# Altium PCB ECE593_Double_Pulse_Project_PCB.PcbDoc
Units mil, origin at the board's own origin, x right, y up, seen from the top; angles counter-clockwise.
Board outline 6000 x 4000 mil, 2 copper layers (Top Layer, Bottom Layer); 70 components, 30 nets, 174 pads, 0 vias.
Unrouted connection lines stored in the file: 128.
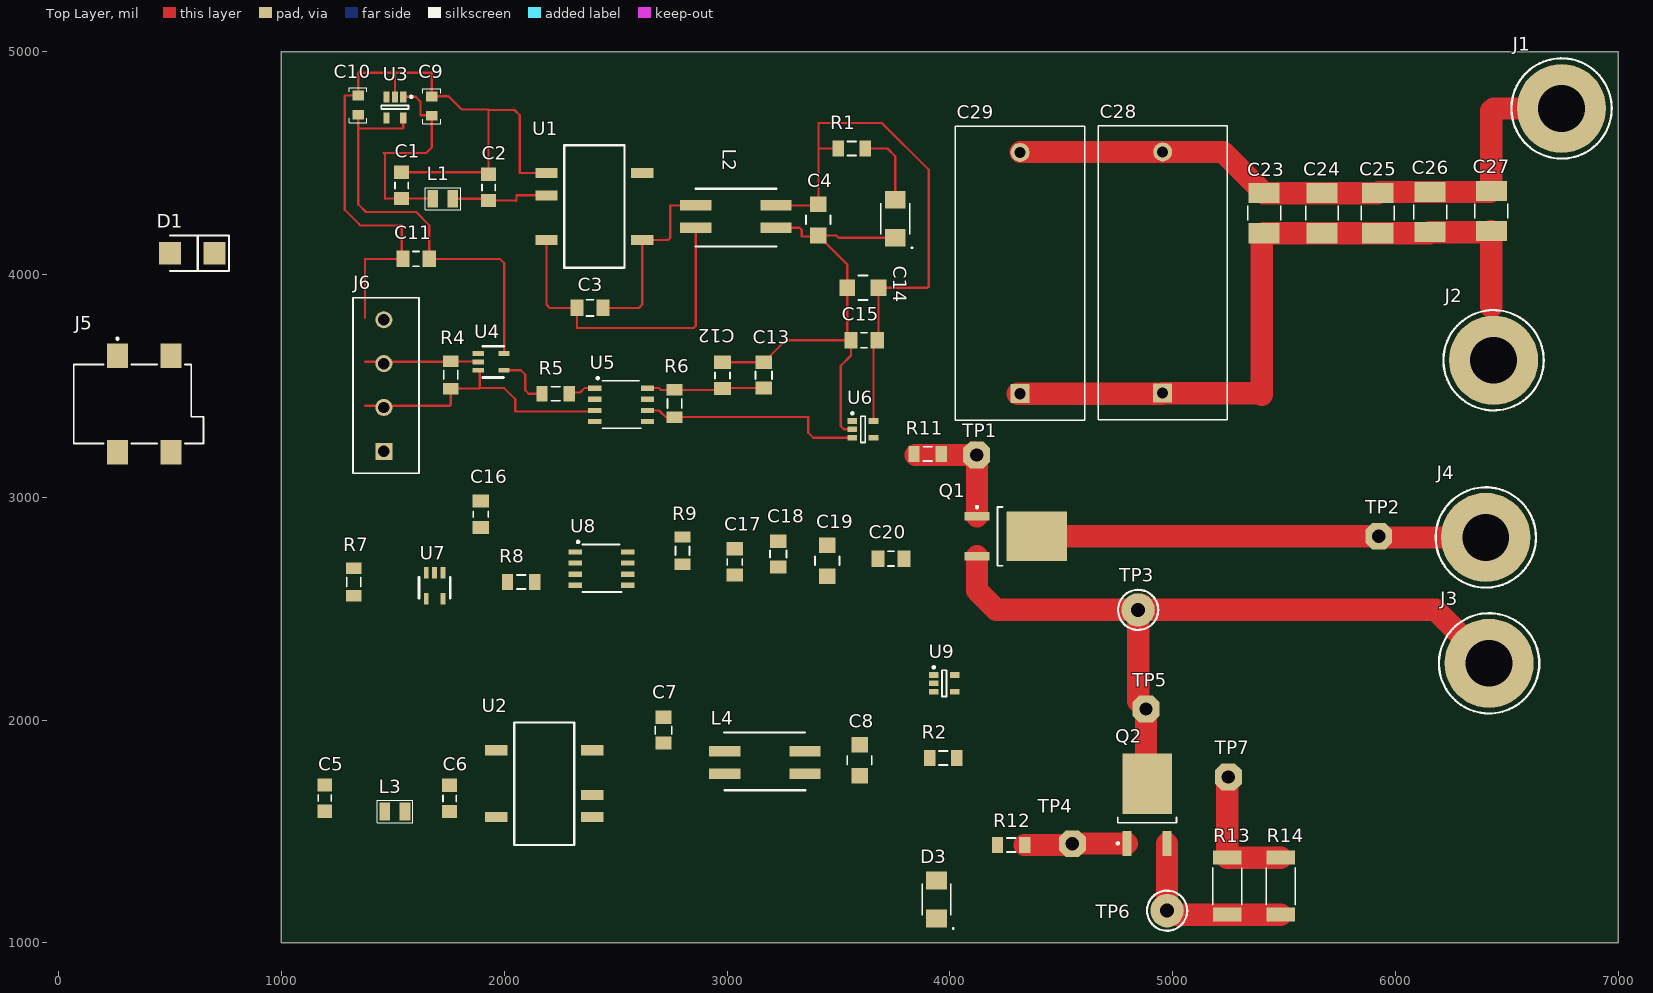
[diagram p0: Top Layer view]
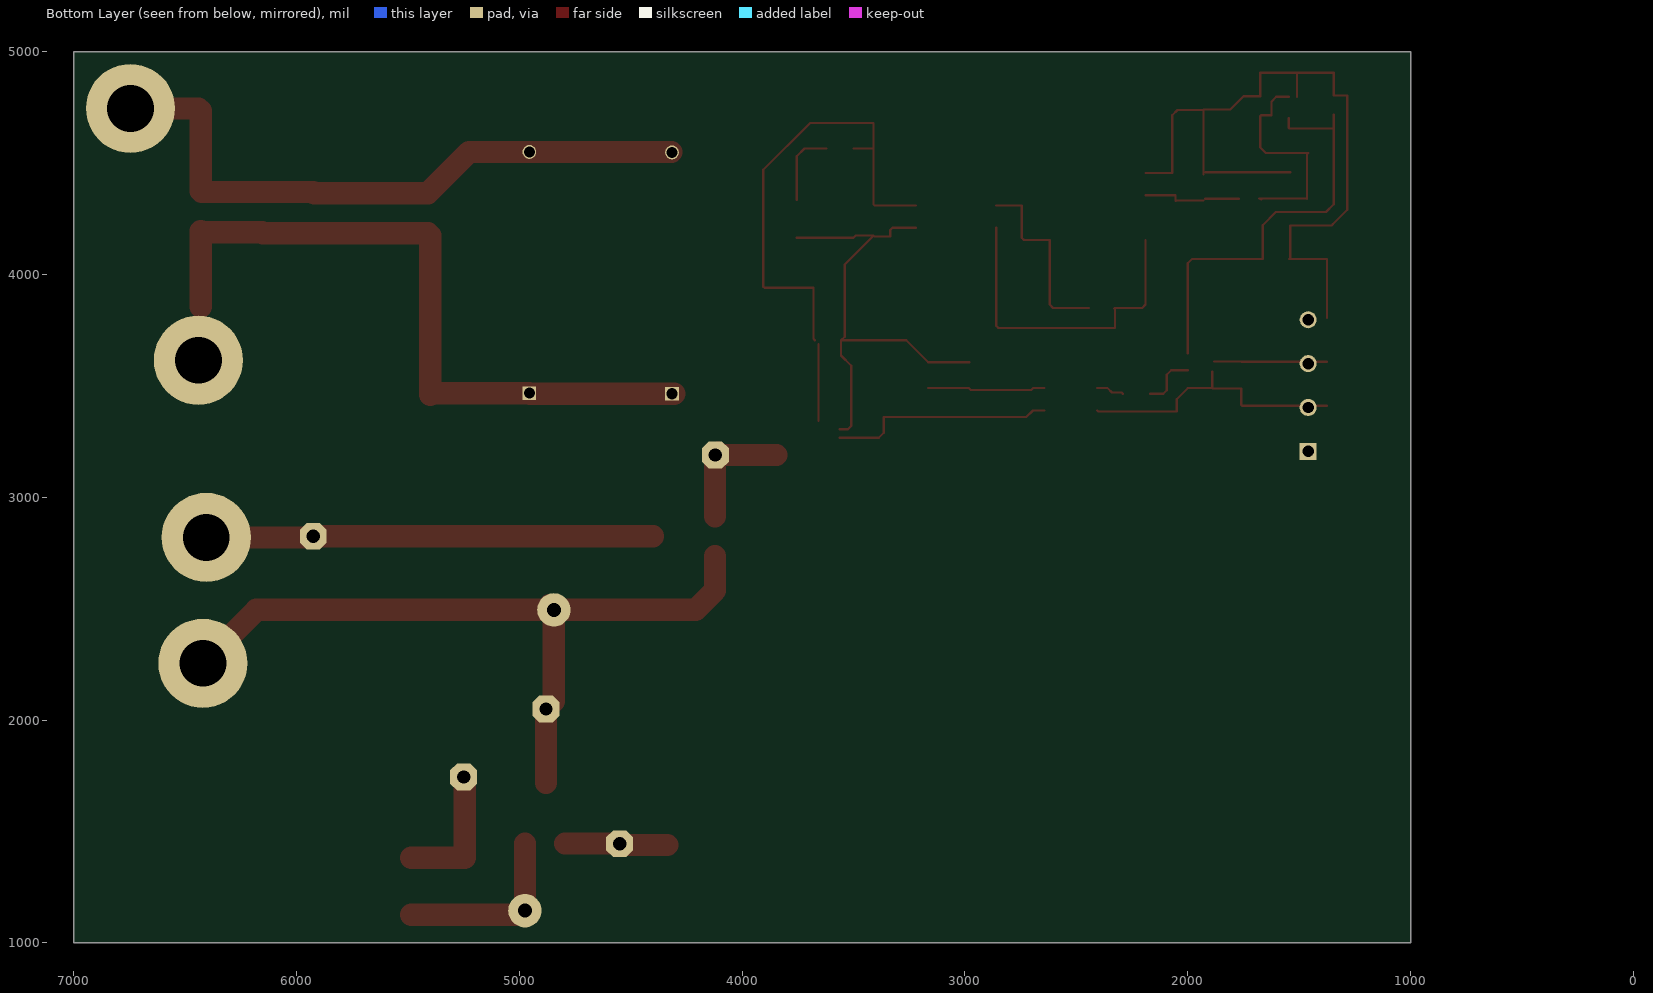
[diagram p1: Bottom Layer view, seen from below]

## Layer stack, top to bottom
Top Solder: solder mask 0.4, Solder Resist, Dk 3.5
Top Layer: signal copper 1.4
Dielectric 1: dielectric 12.6, FR-4, Dk 4.8
Bottom Layer: signal copper 1.4
Bottom Solder: solder mask 0.4, Solder Resist, Dk 3.5

## Board outline
1000,1000 7000,1000 7000,5000 1000,5000

## Design rules (kind name [scope] priority, off if disabled: settings)
Clearance [All] p1: gap=10 ignorepadtopadclearanceinfootprint=FALSE except(0: Arc-Hole Track-Hole SMDPad-Hole THPad-Hole Via-Hole Fill-Hole Poly-Hole Region-Hole Text-Hole)
PolygonConnect [All] p1: connectstyle=Relief reliefconductorwidth=10 reliefentries=4 polygonreliefangle="90 Angle" airgapwidth=10
RoutingVias [All] p1: holewidth=28 width=50 viastyle="Through Hole" minholewidth=28 minwidth=50 maxholewidth=28 maxwidth=50
SolderMaskExpansion [All] p1: expansion=4 istentingtop=FALSE
Width [All] p1: maxlimit=100 minlimit=10 preferedwidth=10
30 further rules are at their usual default settings.

## Classes and differential pairs
net class test1: +3.6 +5 GND
component class Main_Page: C23 C24 C25 C26 C27 C28 C29 J1 J2 J3 J4 Q1 R12 R13 R14 TP1 TP2 TP4 TP5 TP6 TP7
component class GateDrive: C11 C12 C13 C14 C16 C17 C18 C19 C20 R4 R5 R6 R7 R8 R9 U4 U6 U7 U8 U9
component class BoardPower: C1 C2 C3 C4 C5 C6 C7 C8 C9 C10 D1 D3 J5 J6 L1 L2 L3 L4 R1 R2 U1 U2 U3

## Components (designator, comment, footprint, x,y, rotation, side; value= is the part's Value field where it differs from the comment)
C1 "Taiyo Yuden UMK316ABJ475KD-T" PCB-sgxvsk2a58hocmmem9zc-1 1540,4400 r90 top
C2 "Taiyo Yuden UMK316ABJ475KD-T" PCB-sgxvsk2a58hocmmem9zc-1 1930,4390.94 r90 top
C3 "CL31A225KB9LNNC" FP-CL31-IPC_A 2385,3850 r180 top
C4 "Samsung CL31A106KACLNNC" CAPC3216X180X50ML20T25 3410,4245 r90 top
C5 "Taiyo Yuden UMK316ABJ475KD-T" PCB-sgxvsk2a58hocmmem9zc-1 1195,1650 r90 top
C6 "Taiyo Yuden UMK316ABJ475KD-T" PCB-sgxvsk2a58hocmmem9zc-1 1755,1649.06 r90 top
C7 "CL31A225KB9LNNC" FP-CL31-IPC_A 2715,1955 r270 top
C8 "Samsung CL31A106KACLNNC" CAPC3216X180X50ML20T25 3595,1820 r270 top
C9 "Würth Elektronik 885012207078" PCB-l1mgbkcjk127aryzwzh1-1 1675,4755 r270 top
C10 "Würth Elektronik 885012207078" PCB-l1mgbkcjk127aryzwzh1-1 1345,4760 r270 top
C11 "C1206C104K5RACTU" KEMT-1206-2_M 1605,4070 r180 top
C12 "C1206C104K5RACTU" KEMT-1206-2_M 2980,3546.89 r270 top
C13 "CL31A225KB9LNNC" FP-CL31-IPC_A 3165,3548.12 r90 top
C14 "Samsung CL31A106KACLNNC" CAPC3216X180X50ML20T25 3610,3940 r0 top
C15 "C1206C104K5RACTU" KEMT-1206-2_M 3615,3705 r0 top
C16 "C1206C104K5RACTU" KEMT-1206-2_M 1895,2924.06 r90 top
C17 "C1206C104K5RACTU" KEMT-1206-2_M 3035,2710 r90 top
C18 "CL31A225KB9LNNC" FP-CL31-IPC_A 3230,2745 r270 top
C19 "Samsung CL31A106KACLNNC" CAPC3216X180X50ML20T25 3450,2715 r90 top
C20 "C1206C104K5RACTU" KEMT-1206-2_M 3735.94,2725 r0 top
C23 "220 nF" CAPC480350_185N_KEM-M 5410,4275 r90 top
C24 "220 nF" CAPC480350_185N_KEM-M 5670,4275 r90 top
C25 "220 nF" CAPC480350_185N_KEM-M 5920,4275 r90 top
C26 "220 nF" CAPC480350_185N_KEM-M 6155,4280 r90 top
C27 "220 nF" CAPC480350_185N_KEM-M 6430,4285 r90 top
C28 "10 uF" DCP4_13.0WX24.0HX31.5L_2PIN_WIM 4955,3467.32 r90 top
C29 "10 uF" DCP4_13.0WX24.0HX31.5L_2PIN_WIM 4315,3465 r90 top
D1 "Comchip CDBA240L-HF" PCB-vqvgyl4w7md68ovtiswz-1 600,4095 r180 top
D2 "QTLP651C4TR" SMD-2_3P2X1P7_ONS-M 3755,4250 r90 top
D3 "QTLP651C4TR" SMD-2_3P2X1P7_ONS-M 3940,1195 r90 top
J1 "Keystone 575-4" PCB-csc5n6emwyzdyne8ltju-1 6745,4745 r0 top
J2 "Keystone 575-4" PCB-csc5n6emwyzdyne8ltju-1 6440,3615 r0 top
J3 "Keystone 575-4" PCB-csc5n6emwyzdyne8ltju-1 6420,2255 r0 top
J4 "Keystone 575-4" PCB-csc5n6emwyzdyne8ltju-1 6405,2820 r0 top
J5 "PJ-002AH-SMT-TR" CUI-PJ-002AH-4_V 359.33,3418.46 r0 top
J6 "691137710004" 691137710004 1469.84,3501.58 r90 top
L1 "TDK VLS252008ET-6R8M" PCB-fkaygjadjjsdxx713cih-1 1680,4340 r0 top value="6.8  µH"
L2 "Bourns SRF0905-100Y" PCB-3xxuz9rz4wogwyauw14r-1 3040,4260 r0 top
L3 "TDK VLS252008ET-6R8M" PCB-fkaygjadjjsdxx713cih-1 1465,1590 r0 top value="6.8  µH"
L4 "Bourns SRF0905-100Y" PCB-3xxuz9rz4wogwyauw14r-1 3170,1810 r180 top
Q1 "IPD60R380C6" INF-PG-TO252-3-313_M 4295,2825 r0 top
Q2 "IPD60R380C6" INF-PG-TO252-3-313_M 4885,1620 r90 top
R1 "RMCF1206FT1K00" RESC3216X60X45ML10T20 3560,4565 r180 top
R2 "RMCF1206FT1K00" RESC3216X60X45ML10T20 3970,1830 r180 top
R4 "RMCF1206FT10K0" RESC3216X60X45ML10T20 1760,3548.98 r270 top
R5 "CRCW1206511RFKEA" RESC3216X60X45ML10T20 2231.02,3465 r0 top
R6 "RMCF1206FT10K0" RESC3216X60X45ML10T20 2765,3421.02 r270 top
R7 "RMCF1206FT10K0" RESC3216X60X45ML10T20 1325,2620 r90 top
R8 "CRCW1206511RFKEA" RESC3216X60X45ML10T20 2076.02,2620 r0 top
R9 "RMCF1206FT10K0" RESC3216X60X45ML10T20 2800,2761.02 r270 top
R11 "CRCW120612R0JNEA" RESC3216X60X45ML10T20 3900,3195 r0 top
R12 "CRCW120612R0JNEA" RESC3216X60X45ML10T20 4275,1440 r0 top
R13 "CSRN2512FKR200" FP-CSRN2512-MFG 5245,1255 r90 top
R14 "CSRN2512FKR200" FP-CSRN2512-MFG 5485,1255 r90 top
TP1 "Keystone Electronics 5000" PCB-gm3691gcwmiln8nb0eoq-1 4120,3190 r0 top
TP2 "Keystone Electronics 5000" PCB-gm3691gcwmiln8nb0eoq-1 5925,2825 r0 top
TP3 "Keystone 5011" PCB-qzb0vyxebd51imkzt9uv-1 4845,2495 r0 top
TP4 "Keystone Electronics 5000" PCB-gm3691gcwmiln8nb0eoq-1 4550,1445 r0 top
TP5 "Keystone Electronics 5000" PCB-gm3691gcwmiln8nb0eoq-1 4880,2050 r0 top
TP6 "Keystone 5011" PCB-qzb0vyxebd51imkzt9uv-1 4975,1145 r0 top
TP7 "Keystone Electronics 5000" PCB-gm3691gcwmiln8nb0eoq-1 5250,1745 r0 top
U1 "CUI PDS1-S5-S12-M-TR" PCB-db6tqtrzp4l61tosig05-1 2405,4305 r270 top
U2 "CUI PDS1-S5-S12-M-TR" PCB-db6tqtrzp4l61tosig05-1 2180,1715 r90 top
U3 "STMicroelectronics LDK220M36R" SOT23-5L 1510,4750 r270 top
U4 "Diodes Incorporated ‎74LVC1G14W5-7‎" PCB-kpbwuq3jjzqbef0a2xnc-1 1888.7,3607.6 r270 top
U5 "ISO7710D" D0008B_HV 2525,3415 r0 top
U6 "UCC27518DBVR" PCB-2253518-1 3610,3305 r0 top
U7 "Diodes Incorporated ‎74LVC1G14W5-7‎" PCB-kpbwuq3jjzqbef0a2xnc-1 1687.6,2656.3 r180 top
U8 "ISO7710D" D0008B_HV 2436.73,2680 r0 top
U9 "UCC27518DBVR" PCB-2253518-1 3975,2165 r0 top

## Footprints (in the part's own frame and the unit in brackets; to place one, negate y for a bottom-side part, rotate by r counter-clockwise, add the part's x,y. Pads: shape width x height; smd on the part's side, far side on the other; paste and mask are expansions set on the pad)
691137710004 [mm] "Horizontal Cable Entry with Pressure Clamp, pitch 5mm, 04p"
  rect 1.95x1.95 hole 1.3: 1(-7.5,0.25)
  round 1.95 hole 1.3: 2(-2.5,0.25) 3(2.5,0.25) 4(7.5,0.25)
  silkscreen extent -10,-3.75 10,3.75, body extent -10,-3.75 10,3.75, height 11.6
CAPC3216X180X50ML20T25 [mil]
  rect 70x74.8 smd: 1(-70,0) 2(70,0)
  silkscreen extent -20,-55 20,55, body extent -67,-35 67,35, height 71
CAPC480350_185N_KEM-M [mil]
  rect 90x139.79 smd paste+0 mask+0: 1(-90,0) 2(90,0)
  silkscreen extent -33,-74 33,74, body extent -94,-69 94,69, height 73
CUI-PJ-002AH-4_V [mm] "SMD, 4-Leads, Body 14.8x9 mm, Pitch 6.1mm"
  rect 2.4x2.8 smd: 1(-2.4,5.5) 1(3.7,5.5) 2(-2.4,-5.5) 3(3.7,-5.5)
  round 0 hole 1.6: MH1(-2.4,0)
  round 0 hole 1.8: MH2(2.1,0)
  silkscreen extent -7.4,-4.5 7.4,7.57, body extent -7.4,-6.3 7.4,6.3, height 11.2
D0008B_HV [mil]
  rect 60x23.62 smd paste+0 mask+2: 1(-118,75) 2(-118,25) 3(-118,-25) 4(-118,-75) 5(118.27,-75) 6(118.27,-25) 7(118.27,25) 8(118.27,75)
  silkscreen extent -110,-105 90,125, body extent -119,-96 119,96, height 64
DCP4_13.0WX24.0HX31.5L_2PIN_WIM [mil]
  rect 85x85 / inner rect 62x62 / far side rect 62x62 hole 50 mask+0: 1(0,0)
  round 85 / inner round 62 / far side round 62 hole 50 mask+0: 2(1082.68,0)
  silkscreen extent -120,-290 1200,290, body extent -79,-256 1161,256, height 945
FP-CL31-IPC_A [mil]
  rect 59.27x73.16 smd paste+0 mask+0: 1(-58.12,0) 2(58.12,0)
  silkscreen extent -17,-37 17,37, body extent -107,-56 107,56, height 10
FP-CSRN2512-MFG [mm]
  rect 1.6x3.2 smd paste+0 mask+0: 1(-3.25,0) 2(3.25,0)
  silkscreen extent -2.07,-1.65 2.07,1.65, body extent -4.15,-1.75 4.15,1.75, height 0.25
INF-PG-TO252-3-313_M [mm]
  rect 2.85x1 smd: 1(-4.4,2.28) 3(-4.4,-2.28)
  rect 6.9x5.65 smd: 2(2.4,0)
  silkscreen extent -4.52,-3.35 -1.45,3.45, body extent -2.05,-3.32 4.17,3.32, height 2.35
KEMT-1206-2_M [mm] "SMD, 2-Leads, Body 3.4x1.8mm, IPC Low Density"
  rect 1.5x1.9 smd: 1(-1.5,0) 2(1.5,0)
  silkscreen extent -0.35,-0.85 0.35,0.85, body extent -1.7,-0.9 1.7,0.9, height 0.88
PCB-3xxuz9rz4wogwyauw14r-1 [mil]
  rect 140x47.24 smd: 1(-180,-50) 2(-180,50) 3(180,50) 4(180,-50)
  silkscreen extent -181,-135 182,125, body extent -181,-118 181,118, height 193
PCB-2253518-1 [mm]
  rect 1.1x0.65 smd: 1(-1.2,0.95) 2(-1.2,0) 3(-1.2,-0.95) 4(1.2,-0.95) 5(1.2,0.95)
  silkscreen extent -1.32,-1.5 0.25,1.95, body extent -0.83,-1.49 0.83,1.5, height 1.19
PCB-csc5n6emwyzdyne8ltju-1 [mil]
  round 400 hole 210: 1(0,0)
  silkscreen extent -225,-225 225,225, body extent -156,-156 156,156, height 200
PCB-db6tqtrzp4l61tosig05-1 [mil]
  rect 45x100 smd: 0(-150,215) 1(-150,-215) 2(-50,-215) 4(150,-215) 5(150,215)
  silkscreen extent -275,-135 275,135, body extent -250,-221 250,221, height 276
PCB-fkaygjadjjsdxx713cih-1 [mm]
  rect 1.2x2 smd: 1(0,0) 2(2.286,0)
  silkscreen extent -0.89,-1.27 3.17,1.27, body extent -0.15,-0.97 2.35,1.03, height 0.25
PCB-gm3691gcwmiln8nb0eoq-1 [mil]
  oct 120x120 hole 60: TP(0,0)
  body extent -50,-50 50,50, height 180
PCB-kpbwuq3jjzqbef0a2xnc-1 [mm]
  rect 0.55x1.27 smd: 1(-0.95,-0.127) 2(0,-0.127) 3(0.95,-0.127) 4(0.95,2.827) 5(-0.95,2.827)
  silkscreen extent -1.78,0.38 1.78,2.76, body extent -1.45,0 1.45,2.8, height 1.2
PCB-l1mgbkcjk127aryzwzh1-1 [mm]
  rect 1.1x1.35 smd: 1(-1.1,0) 2(1.1,0)
  silkscreen extent -2,-1 2,1, body extent -1.1,-0.72 1.1,0.72, height 1.4
PCB-qzb0vyxebd51imkzt9uv-1 [mil]
  round 150 hole 63: 1(0,0)
  silkscreen extent -90,-90 90,90, body extent -62,-62 63,63, height 320
PCB-sgxvsk2a58hocmmem9zc-1 [mm]
  rect 1.5x1.7 smd: 1(-1.5,0) 2(1.5,0)
  silkscreen extent -0.35,-0.75 0.35,0.75, body extent -1.7,-0.9 1.7,0.9, height 0.88
PCB-vqvgyl4w7md68ovtiswz-1 [mil]
  rect 100x100 smd: 1(100,0) 2(-100,0)
  silkscreen extent -165,-80 100,80, body extent -104,-57 104,57, height 100
RESC3216X60X45ML10T20 [mm] "Chip Resistor, 2-Leads, Body 3.20x1.60mm, IPC Low Density"
  rect 1.3x1.8 smd: 1(-1.55,0) 2(1.55,0)
  silkscreen extent -0.5,-0.8 0.5,0.8, body extent -1.65,-0.85 1.65,0.85, height 0.6
SMD-2_3P2X1P7_ONS-M [mil]
  rect 80x93 smd paste+0 mask+0: 1(-85,0) 2(85,0)
  silkscreen extent -133,-78 70,64, body extent -73,-59 73,59, height 83
SOT23-5L [mm]
  rect 1.25x0.7 smd: 1(-1.2,0.95) 2(-1.2,0) 3(-1.2,-0.95) 4(1.2,-0.95) 5(1.2,0.95)
  silkscreen extent -1.32,-1.55 0.2,1.98, body extent -0.87,-1.52 0.87,1.53, height 1.1

## Part data
C1 C2 C5 C6: library part CMP-7a94b2a8e5e7a553-1, "Cap Ceramic 4.7uF 50V X5R 10% SMD 1206 85°C Paper T/R", Capacitance="4.70 µF", Capacitance Tolerance=±10%, Dielectric Characteristic=X5R, Manufacturer Part Number=UMK316ABJ475KD-T, Voltage Rating (DC)="50.0 V", Lifecycle Status="Not Listed by Manufacturer", Number of Pins=2, Octopart URL=http://octopart.com/umk316abj475kd-t-taiyo+yuden-20363797, OctopartID=7a94b2a8e5e7a553, Packaging="Cut Tape (CT)", RoHS=Compliant, Supplier=Digikey, Supplier Part Number=UMK316ABJ475KD-T
C3 C7 C13 C18: library part CMP-13271-003141-1, "Cap Ceramic 2.2uF 50V X5R ±10% SMD 1206 +85°C Embossed T/R", Capacitance=2.2uF, Case Code (Imperial)=1206, Case Code (Metric)=3216, Dielectric=X5R, Max Operating Temperature=85°C, Min Operating Temperature=-55°C, Supplier Part Number=1276-2723-1-ND, Tolerance=10%, Voltage Rating=50V, Case/Package=1206, Depth=1.6mm, Height=0.9mm, Length=3.2mm, Mount="Surface Mount", Packaging="Tape and Reel", Radiation Hardening=No, Supplier=Digikey, Thickness=0.039inch, Width=0.063inch
C4 C8 C14 C19: library part CMP-20112613-2, "10 µF ±10% 25V Ceramic Capacitor X5R 1206 (3216 Metric)", Capacitance=10uF, Capacitance Tolerance=±10%, Case/Package=1206, Case/Package (SI)=3216, Dielectric Characteristic=X5R, Dielectric Material=Ceramic, Supplier Part Number=CL31A106KACLNNC, Voltage Rating (DC)="25.0 V", Lead-Free Status="Lead Free", Mounting Style="Surface Mount", Number of Pins=2, REACH SVHC Compliance="No SVHC", RoHS=Compliant, Supplier=Digikey
C9 C10: library part CMP-e4702e9cfb553bb7-2, "Capacitor, Mlcc, X7r, 1 uf, 25v, 0805", Capacitance="1 uF", Capacitance Tolerance=±10%, Dielectric Characteristic=X7R, Manufacturer Part Number=885012207078, Supplier Part Number=732-7672-1-ND, Voltage Rating (DC)="25.0 V", Digikey Number=732-7672-1-ND, Packaging="Cut Tape (CT)", RoHS=Compliant, Supplier=Digikey
C11 C12 C15 C16 C17 C20: library part CMP-1037-04202-2, "CAP, Ceramic, 0.1 uF, +/- 10%, 50 V, -55 to 125 degC, 1206 (3216 Metric), RoHS, Tape and Reel", Capacitance=0.1µF, Capacitance Tolerance=±10%, Capacitor Case Style=1206[3216Metric], Dielectric Characteristic=X7R, Manufacturer=Kemet, Operating Temperature Max=125degC, Operating Temperature Min=-55degC, Package Description="2-Leads SMD, Body 3.2 x 1.6 mm", Package Reference=1206-2, Supplier Part Number=399-C1206C104K5RAC7800CT-ND, Voltage Rating=50V, Datasheet URL=https://datasheet.ciiva.com/6125/1725438-6125494.pdf, Datasheet Version=Jul-13, Manufacturer URL=http://www.kemet.com/, Packaging=Tape&Reel, Product Range=KEMET-CSeries, Supplier=Digikey, SVHC=ToBeAdvised
C23: library part C1812C224KCRACAUTO, "CAP CER 1812 220NF 500V X7R 10%", Mfr_Name=Kemet, Copyright="Copyright (C) 2022 Ultra Librarian. All rights reserved.", Digi-Key_Part_Number_1=399-16784-2-ND, Digi-Key_Part_Number_2=399-16784-1-ND, Digi-Key_Part_Number_3=399-16784-6-ND, Manufacturer_Part_Number=C1812C224KCRACAUTO, RefDes=RefDes, Supplier=Digikey, Supplier Part Number=C1812C224KCRACAUTO, Type=DEV
C24 C25 C26 C27: library part C1812C224KCRACAUTO, "No Description Available", Mfr_Name=Kemet, Copyright="Copyright (C) 2022 Ultra Librarian. All rights reserved.", Digi-Key_Part_Number_1=399-16784-2-ND, Digi-Key_Part_Number_2=399-16784-1-ND, Digi-Key_Part_Number_3=399-16784-6-ND, Manufacturer_Part_Number=C1812C224KCRACAUTO, RefDes=RefDes, Supplier=Digikey, Supplier Part Number=C1812C224KCRACAUTO, Type=DEV
C28 C29: library part DCP4H151006DD2KSSD, "10 µF Film Capacitor - 500V Polypropylene (PP), Metallized Radial", Mfr_Name=Wima, Supplier Part Number=1928-DCP4H151006DD2KSSD-ND, Copyright="Copyright (C) 2022 Ultra Librarian. All rights reserved.", Digi-Key_Part_Number_1=1928-DCP4H151006DD2KSSD-ND, Manufacturer_Part_Number=DCP4H151006DD2KSSD, RefDes=RefDes, Supplier=Digikey, Type=DEV
D1: library part CMP-7a73b224736fa5b4-1, "DIODE SCHOTTKY 40V 2A DO214AC", Manufacturer Part Number=CDBA240L-HF, Octopart URL=http://octopart.com/cdba240l-hf-comchip-22883450, OctopartID=7a73b224736fa5b4, Supplier=Digikey, Supplier Part Number=CDBA240L-HF
D2 D3: "LED GREEN CLEAR 1206 SMD", Mfr_Name=onsemi, Supplier Part Number=QTLP651C4TR-ND, Copyright="Copyright (C) 2022 Ultra Librarian. All rights reserved.", Manufacturer_Part_Number=QTLP651C4TR, RefDes=RefDes, Supplier=Digikey, Type=DEV
J1 J2 J3 J4: library part CMP-d3511a5899970c96-2, "Banana Jack, Non-Insulated, 1-Pin THD, RoHS, Bulk", Manufacturer Part Number=575-4, Supplier Part Number=36-575-4-ND, Contact Material=Brass, Contact Plating=Nickel, Lead-Free Status="Lead Free", Number of Positions=1, Octopart URL=http://octopart.com/575-4-keystone-225184, OctopartID=d3511a5899970c96, RoHS=Compliant, Size-Diameter="0.0051562 m", Size-Length="0.007899 m", Supplier=Digikey
J5: library part CMP-2000-06896-1, "Power Barrel Connector Jack 2.00mm ID (0.079\"), 5.50mm OD (0.217\") Surface Mount", Current Rating=5A, Flammability Rating=UL94V-0, Insulation Resistance=100MOhms, Manufacturer=CUIInc., Operating Temperature Range=-25Cto+85C, Package Description="4-Pin Surface Mount Device, Body 14.8 x 9 mm, Pitch 6.1 mm", Package Reference=PJ-002AH, Voltage Rating=24V, Brand=CUI, Connector Type=DCPowerJack, Contact Gender=Male, Contact Material=Brass, Contact Plating=Nickel, Datasheet URL=http://www.cui.com/product/resource/pj-002ah-smt.pdf, Datasheet Version="Rev. 1.03, 11/2012", Factory Pack Quantity=350, Housing Material=Polyamide(PA), Inside Contact Diameter=2mm, Manufacturer URL=http://www.cui.com/, Mounting Angle=Right, Mounting Style=SMD/SMT, Mounting Technology=SurfaceMount, Outside Contact Diameter=6.5mm, Packaging=Reel, PartNumber=PJ-002AH, Product=Jacks, Product Category=DCPowerConnectors, RoHS=True, Supplier=Digikey, Supplier Part Number=PJ-002AH-SMT-TR, Termination Style=SMD/SMT
J6: library part CMP-1502-03326-1, "Series 1377 - 5.00 mm Horizontal Entry with Pressure Clamp WR-TBL, 4 pin", Operating Temperature=-30to120degC, Supplier Part Number=277-1579-ND, Mounting Technology=THT, Packaging=Box, Pin Number=4, Pitch=5.00mm, Supplier=Digikey
L1 L3: library part CMP-b12479fff73a6ee3-1, "Ind Power Shielded Wirewound 6.8uH 20% 1MHz Ferrite 500A 1008 Blister Plastic T/R", Manufacturer Part Number=VLS252008ET-6R8M, Supplier Part Number=445-15826-1-ND, Octopart URL=http://octopart.com/vls252008et-6r8m-tdk-30499704, OctopartID=b12479fff73a6ee3, RoHS=Compliant, Supplier=Digikey
L2 L4: library part CMP-726ebbfbaae1ada9-1, "Common Mode Chokes Dual 10uH 200Ohm 1kHz 1.6A 80mOhm DCR SMD T/R", Inductance="10.0  uH", Manufacturer Part Number=SRF0905-100Y, Supplier Part Number=SRF0905-100YCT-ND, Voltage Rating (DC)="50.0 V", Number of Pins=4, Octopart URL=http://octopart.com/srf0905-100y-bourns-10485225, OctopartID=726ebbfbaae1ada9, REACH SVHC Compliance="No SVHC", RoHS=Compliant, Supplier=Digikey
Q1 Q2: "N-Channel CoolMOS C6 Power-Transistor, 600 V VDS, 10.6 A ID, -55 to 150 degC, PG-TO252-3-313, Reel, Green", Power Dissipation="83.0 W", Supplier Part Number=IPD60R380C6INCT-ND, Lead-Free Status="Lead Free", Number of Pins=3, Octopart URL=https://octopart.com/ipd60r380c6-infineon-19074978, OctopartID=4865804c62a197a2, Polarity=N-Channel, REACH SVHC Compliance="No SVHC", RoHS=Compliant, Supplier=Digikey
R1 R2: library part CMP-2003-01783-1, "1 kOhms ±1% 0.25W, 1/4W Chip Resistor 1206 (3216 Metric) Automotive AEC-Q200 Thick Film", Case Code (Imperial)=1206, Case Code (Metric)=3216, Manufacturer=Vishay, Manufacturer Part Number=CRCW1206-10K0FKEA, Max Operating Temperature=155°C, Max Power Dissipation=250mW, Min Operating Temperature=-55°C, Package Quantity=10, Package Shape=Rectangular, Resistance=1k, Resistance Tolerance=1%, Resistor Type="Thick Film", Supplier Part Number=RMCF1206FT1K00CT-ND, Temperature Coefficient=100ppm/°C, Voltage Rating=200V, Case/Package=1206, ComponentLink1Description=https://datasheet.ciiva.com/6546/crcwhpe3-6546125.pdf?src-supplier=Digi-Key, ComponentLink1URL=https://datasheet.ciiva.com/6546/crcwhpe3-6546125.pdf?src-supplier=Digi-Key, ComponentLink2Description=https://datasheet.ciiva.com/48526/crcwhpe3-48526573.pdf?src-supplier=Avnet, ComponentLink2URL=https://datasheet.ciiva.com/48526/crcwhpe3-48526573.pdf?src-supplier=Avnet, ComponentLink3Description=https://datasheet.ciiva.com/6546/crcwhpe3-6546126.pdf?src-supplier=Digi-Key, ComponentLink3URL=https://datasheet.ciiva.com/6546/crcwhpe3-6546126.pdf?src-supplier=Digi-Key, ComponentLink4Description=https://datasheet.ciiva.com/6546/crcwhpe3-6546127.pdf?src-supplier=Digi-Key, ComponentLink4URL=https://datasheet.ciiva.com/6546/crcwhpe3-6546127.pdf?src-supplier=Digi-Key, ComponentLink5Description=https://datasheet.ciiva.com/12559/crcwhpe3-46056-12559151.pdf?src-supplier=Mouser, ComponentLink5URL=https://datasheet.ciiva.com/12559/crcwhpe3-46056-12559151.pdf?src-supplier=Mouser, ComponentLink6Description=https://datasheet.ciiva.com/48526/crcwhpe3-48526575.pdf?src-supplier=Avnet, ComponentLink6URL=https://datasheet.ciiva.com/48526/crcwhpe3-48526575.pdf?src-supplier=Avnet, ComponentLink7Description=https://datasheet.ciiva.com/11810/0900766b80d98b5e-11810137.pdf?src-supplier=RSComponents, ComponentLink7URL=https://datasheet.ciiva.com/11810/0900766b80d98b5e-11810137.pdf?src-supplier=RSComponents, ComponentLink8Description=https://datasheet.ciiva.com/19454/2173693-19454829.pdf?src-supplier=Jameco, ComponentLink8URL=https://datasheet.ciiva.com/19454/2173693-19454829.pdf?src-supplier=Jameco, ComponentLink9Description=https://datasheet.ciiva.com/2468/dcrcwe3-2468664.pdf?src-supplier=Digi-Key, ComponentLink9URL=https://datasheet.ciiva.com/2468/dcrcwe3-2468664.pdf?src-supplier=Digi-Key, ComponentLink10Description=https://datasheet.ciiva.com/5542/dcrcwe3-109170-5542312.pdf?src-supplier=Mouser, ComponentLink10URL=https://datasheet.ciiva.com/5542/dcrcwe3-109170-5542312.pdf?src-supplier=Mouser, ComponentLink11Description=https://datasheet.ciiva.com/2468/dcrcwe3-2468665.pdf?src-supplier=Digi-Key, ComponentLink11URL=https://datasheet.ciiva.com/2468/dcrcwe3-2468665.pdf?src-supplier=Digi-Key, ComponentLink12Description=https://datasheet.ciiva.com/2468/dcrcwe3-2468666.pdf?src-supplier=Digi-Key, ComponentLink12URL=https://datasheet.ciiva.com/2468/dcrcwe3-2468666.pdf?src-supplier=Digi-Key, ComponentLink13Description=https://datasheet.ciiva.com/9050/dcrcwe3-9050925.pdf?src-supplier=Avnet, ComponentLink13URL=https://datasheet.ciiva.com/9050/dcrcwe3-9050925.pdf?src-supplier=Avnet, ComponentLink14Description=https://datasheet.ciiva.com/16852/dcrcwe3-16852541.pdf?src-supplier=Avnet+Europe, ComponentLink14URL=https://datasheet.ciiva.com/16852/dcrcwe3-16852541.pdf?src-supplier=Avnet+Europe, ComponentLink15Description=https://datasheet.ciiva.com/46381/1720486-46381597.pdf?src-supplier=Element14, ComponentLink15URL=https://datasheet.ciiva.com/46381/1720486-46381597.pdf?src-supplier=Element14, ComponentLink16Description=https://datasheet.ciiva.com/16199/dcrcwe3-16199886.pdf?src-supplier=Future+Electronics, ComponentLink16URL=https://datasheet.ciiva.com/16199/dcrcwe3-16199886.pdf?src-supplier=Future+Electronics, ComponentLink17Description=https://datasheet.ciiva.com/26316/fld-crcw-e3-data-en-26316462.pdf?src-supplier=Distrelec, ComponentLink17URL=https://datasheet.ciiva.com/26316/fld-crcw-e3-data-en-26316462.pdf?src-supplier=Distrelec, ComponentLink18Description=https://datasheet.ciiva.com/16769/70201119-16769375.pdf?src-supplier=Allied+Electronics, ComponentLink18URL=https://datasheet.ciiva.com/16769/70201119-16769375.pdf?src-supplier=Allied+Electronics, Construction=Rectangular, Contact Plating=Tin, Depth=1.6mm, Features="Automotive AEC-Q200", Height=0.55mm, Lead Free="Lead Free", Length=3.2mm, Military Standard=Not, Number of Pins=2, Number of Terminations=2, Packaging="Tape and Reel", Power Rating=250mW, Radiation Hardening=No, REACH SVHC=Unknown, RoHS=Yes, RoHS Compliant=Yes, Size Code=1206, Stock 1=0, Supplier=Digikey, Technology="THICK FILM", Terminal Finish=Tin, Termination=SMD/SMT, Tolerance=1%, Voltage Rating (DC)=200V, Weight=0.000353oz, Width=0.063inch, Working Voltage=200V
R4 R6 R7 R9: library part CMP-2003-01783-1, "10 kOhms ±1% 0.25W, 1/4W Chip Resistor 1206 (3216 Metric) Automotive AEC-Q200 Thick Film", Case Code (Imperial)=1206, Case Code (Metric)=3216, Manufacturer=Vishay, Manufacturer Part Number=CRCW1206-10K0FKEA, Max Operating Temperature=155°C, Max Power Dissipation=250mW, Min Operating Temperature=-55°C, Package Quantity=10, Package Shape=Rectangular, Resistance=10k, Resistance Tolerance=1%, Resistor Type="Thick Film", Supplier Part Number=RMCF1206FT10K0CT-ND, Temperature Coefficient=100ppm/°C, Voltage Rating=200V, Case/Package=1206, ComponentLink1Description=https://datasheet.ciiva.com/6546/crcwhpe3-6546125.pdf?src-supplier=Digi-Key, ComponentLink1URL=https://datasheet.ciiva.com/6546/crcwhpe3-6546125.pdf?src-supplier=Digi-Key, ComponentLink2Description=https://datasheet.ciiva.com/48526/crcwhpe3-48526573.pdf?src-supplier=Avnet, ComponentLink2URL=https://datasheet.ciiva.com/48526/crcwhpe3-48526573.pdf?src-supplier=Avnet, ComponentLink3Description=https://datasheet.ciiva.com/6546/crcwhpe3-6546126.pdf?src-supplier=Digi-Key, ComponentLink3URL=https://datasheet.ciiva.com/6546/crcwhpe3-6546126.pdf?src-supplier=Digi-Key, ComponentLink4Description=https://datasheet.ciiva.com/6546/crcwhpe3-6546127.pdf?src-supplier=Digi-Key, ComponentLink4URL=https://datasheet.ciiva.com/6546/crcwhpe3-6546127.pdf?src-supplier=Digi-Key, ComponentLink5Description=https://datasheet.ciiva.com/12559/crcwhpe3-46056-12559151.pdf?src-supplier=Mouser, ComponentLink5URL=https://datasheet.ciiva.com/12559/crcwhpe3-46056-12559151.pdf?src-supplier=Mouser, ComponentLink6Description=https://datasheet.ciiva.com/48526/crcwhpe3-48526575.pdf?src-supplier=Avnet, ComponentLink6URL=https://datasheet.ciiva.com/48526/crcwhpe3-48526575.pdf?src-supplier=Avnet, ComponentLink7Description=https://datasheet.ciiva.com/11810/0900766b80d98b5e-11810137.pdf?src-supplier=RSComponents, ComponentLink7URL=https://datasheet.ciiva.com/11810/0900766b80d98b5e-11810137.pdf?src-supplier=RSComponents, ComponentLink8Description=https://datasheet.ciiva.com/19454/2173693-19454829.pdf?src-supplier=Jameco, ComponentLink8URL=https://datasheet.ciiva.com/19454/2173693-19454829.pdf?src-supplier=Jameco, ComponentLink9Description=https://datasheet.ciiva.com/2468/dcrcwe3-2468664.pdf?src-supplier=Digi-Key, ComponentLink9URL=https://datasheet.ciiva.com/2468/dcrcwe3-2468664.pdf?src-supplier=Digi-Key, ComponentLink10Description=https://datasheet.ciiva.com/5542/dcrcwe3-109170-5542312.pdf?src-supplier=Mouser, ComponentLink10URL=https://datasheet.ciiva.com/5542/dcrcwe3-109170-5542312.pdf?src-supplier=Mouser, ComponentLink11Description=https://datasheet.ciiva.com/2468/dcrcwe3-2468665.pdf?src-supplier=Digi-Key, ComponentLink11URL=https://datasheet.ciiva.com/2468/dcrcwe3-2468665.pdf?src-supplier=Digi-Key, ComponentLink12Description=https://datasheet.ciiva.com/2468/dcrcwe3-2468666.pdf?src-supplier=Digi-Key, ComponentLink12URL=https://datasheet.ciiva.com/2468/dcrcwe3-2468666.pdf?src-supplier=Digi-Key, ComponentLink13Description=https://datasheet.ciiva.com/9050/dcrcwe3-9050925.pdf?src-supplier=Avnet, ComponentLink13URL=https://datasheet.ciiva.com/9050/dcrcwe3-9050925.pdf?src-supplier=Avnet, ComponentLink14Description=https://datasheet.ciiva.com/16852/dcrcwe3-16852541.pdf?src-supplier=Avnet+Europe, ComponentLink14URL=https://datasheet.ciiva.com/16852/dcrcwe3-16852541.pdf?src-supplier=Avnet+Europe, ComponentLink15Description=https://datasheet.ciiva.com/46381/1720486-46381597.pdf?src-supplier=Element14, ComponentLink15URL=https://datasheet.ciiva.com/46381/1720486-46381597.pdf?src-supplier=Element14, ComponentLink16Description=https://datasheet.ciiva.com/16199/dcrcwe3-16199886.pdf?src-supplier=Future+Electronics, ComponentLink16URL=https://datasheet.ciiva.com/16199/dcrcwe3-16199886.pdf?src-supplier=Future+Electronics, ComponentLink17Description=https://datasheet.ciiva.com/26316/fld-crcw-e3-data-en-26316462.pdf?src-supplier=Distrelec, ComponentLink17URL=https://datasheet.ciiva.com/26316/fld-crcw-e3-data-en-26316462.pdf?src-supplier=Distrelec, ComponentLink18Description=https://datasheet.ciiva.com/16769/70201119-16769375.pdf?src-supplier=Allied+Electronics, ComponentLink18URL=https://datasheet.ciiva.com/16769/70201119-16769375.pdf?src-supplier=Allied+Electronics, Construction=Rectangular, Contact Plating=Tin, Depth=1.6mm, Features="Automotive AEC-Q200", Height=0.55mm, Lead Free="Lead Free", Length=3.2mm, Military Standard=Not, Number of Pins=2, Number of Terminations=2, Packaging="Tape and Reel", Power Rating=250mW, Radiation Hardening=No, REACH SVHC=Unknown, RoHS=Yes, RoHS Compliant=Yes, Size Code=1206, Supplier=Digikey, Technology="THICK FILM", Terminal Finish=Tin, Termination=SMD/SMT, Tolerance=1%, Voltage Rating (DC)=200V, Weight=0.000353oz, Width=0.063inch, Working Voltage=200V
R5 R8: library part CMP-2003-02260-1, "510 Ohms ±5% 0.25W, 1/4W Chip Resistor 1206 (3216 Metric) Moisture Resistant Thick Film", Case Code (Imperial)=1206, Case Code (Metric)=3216, Manufacturer="Vishay Dale", Manufacturer Part Number=CRCW1206511RFKEAHP, Max Operating Temperature=155°C, Max Power Dissipation=500mW, Min Operating Temperature=-55°C, Package Quantity=5000, Part Number=RC1206JR-07510RL, Resistance=510R, Resistor Type="Thick Film", Supplier Part Number=311-510ERCT-ND, Temperature Coefficient=100ppm/°C, Tolerance=1%, Case/Package=1206, ComponentLink1Description=https://datasheet.ciiva.com/29923/crcwhpe3-29923752.pdf?src-supplier=Avnet, ComponentLink1URL=https://datasheet.ciiva.com/29923/crcwhpe3-29923752.pdf?src-supplier=Avnet, Contact Plating=Tin, Features="Automotive AEC-Q200", Height=0.026inch, Lead Free="Lead Free", Length=0.122inch, Number of Terminations=2, Packaging="Tape and Reel", Pricing 1="1=0.40000, 10=0.28600, 100=0.11450, 1000=0.05644, 2500=0.05229 (USD)", Radiation Hardening=No, RoHS=Yes, RoHS Compliant=Yes, Series=CRCW-HP, Stock 1=3070, Supplier=Digikey, Width=0.063inch
R11 R12: library part CMP-2003-01783-1, "RES SMD 12 OHM 5% 3/4W 1206", Case Code (Imperial)=1206, Case Code (Metric)=3216, Manufacturer="Vishay Dale", Manufacturer Part Number=CRCW120612R0JNEAHP, Max Operating Temperature=155°C, Max Power Dissipation=500mW, Min Operating Temperature=-55°C, Package Quantity=1, Resistance=12Ω, Resistor Type="Thick Film", Supplier Part Number=541-12UACT-ND, Temperature Coefficient=200ppm/°C, Tolerance=5%, Voltage Rating=200V, Case/Package=1206, ComponentLink1Description=https://datasheet.ciiva.com/6546/crcwhpe3-6546125.pdf?src-supplier=Digi-Key, ComponentLink1URL=https://datasheet.ciiva.com/6546/crcwhpe3-6546125.pdf?src-supplier=Digi-Key, ComponentLink2Description=https://datasheet.ciiva.com/48526/crcwhpe3-48526573.pdf?src-supplier=Avnet, ComponentLink2URL=https://datasheet.ciiva.com/48526/crcwhpe3-48526573.pdf?src-supplier=Avnet, ComponentLink3Description=https://datasheet.ciiva.com/6546/crcwhpe3-6546126.pdf?src-supplier=Digi-Key, ComponentLink3URL=https://datasheet.ciiva.com/6546/crcwhpe3-6546126.pdf?src-supplier=Digi-Key, ComponentLink4Description=https://datasheet.ciiva.com/6546/crcwhpe3-6546127.pdf?src-supplier=Digi-Key, ComponentLink4URL=https://datasheet.ciiva.com/6546/crcwhpe3-6546127.pdf?src-supplier=Digi-Key, ComponentLink5Description=https://datasheet.ciiva.com/12559/crcwhpe3-46056-12559151.pdf?src-supplier=Mouser, ComponentLink5URL=https://datasheet.ciiva.com/12559/crcwhpe3-46056-12559151.pdf?src-supplier=Mouser, ComponentLink6Description=https://datasheet.ciiva.com/48526/crcwhpe3-48526575.pdf?src-supplier=Avnet, ComponentLink6URL=https://datasheet.ciiva.com/48526/crcwhpe3-48526575.pdf?src-supplier=Avnet, Construction=Rectangular, Contact Plating=Tin, Depth=1.6mm, Features="Automotive AEC-Q200", Height=0.026inch, Lead Free="Lead Free", Length=0.122inch, Military Standard=Not, Number of Terminations=2, Packaging="Tape and Reel", Part Number=CRCW120612R0JNEA, Power Rating=500mW, Pricing 1="1=0.38000, 10=0.31900, 100=0.12470, 1000=0.05220, 2500=0.04785 (USD)", RoHS=Yes, RoHS Compliant=Yes, Series="CRCW-HP - Automotive", Stock 1=11495, Supplier=Digi-Key, Termination=SMD/SMT, Weight=0.000353oz, Width=0.063inch
R13 R14: library part CMP-26527-000009-2, "Res Thick Film 2512 0.2Ω 1% 2W ±200ppm/°C Molded SMD Plastic T/R", Case Code (Imperial)=2512, Case Code (Metric)=6432, Max Operating Temperature=155°C, Max Power Dissipation=2W, Min Operating Temperature=-55°C, Resistance=200mΩ, Resistor Type="Thick Film", Supplier Part Number=CSRN2512FKR200CT-ND, Temperature Coefficient=200ppm/°C, Tolerance=1%, Case/Package=2512, Contact Plating=Tin, Height=0.028inch, Lead Free="Lead Free", Length=0.25inch, Mount="Surface Mount", Number of Terminations=2, Packaging="Tape and Reel", Power Rating=2W, Radiation Hardening=No, RoHS Compliant=Yes, Series=CSRN, Size Code=2512, Supplier=Digikey, Width=0.124inch
TP1 TP2 TP4 TP5: library part CMP-954153-14, "KEYSTONE   5000   TEST POINT, PCB, THROUGH HOLE", Color=Red, Manufacturer=Keystone, Manufacturer Part Number=5000, Supplier Part Number=36-5000-ND, Contact Material="Phosphor Bronze", Lead-Free Status="Lead Free", Octopart URL=https://octopart.com/5000-keystone-10045, OctopartID=c16f0865c3341ea8, Packaging=Bag, REACH SVHC Compliance="No SVHC", RoHS=Compliant, Size-Diameter="2.54 mm", Size-Height="7.62 mm", Size-Inner Diameter="1.27 mm", Size-Length="7.62 mm", Supplier=Digikey
TP3 TP6: library part CMP-399bf0913da3e65c-1, "Test Point; Black; Thru-Hole; Snap-Fit; SilverPlate; 0.063in. Dia.; 0.445In.", Color=Black, Manufacturer Part Number=5011, Supplier Part Number=36-5011-ND, Contact Material="Phosphor Bronze", Contact Plating=Tin, Lead-Free Status="Lead Free", Mounting Style="Through Hole, PCB", Octopart URL=http://octopart.com/5011-keystone-8542, OctopartID=399bf0913da3e65c, Packaging=Box, REACH SVHC Compliance="No SVHC", RoHS=Compliant, Size-Diameter="3.18 mm", Size-Height="11.3 mm", Size-Inner Diameter="1.78 mm", Size-Length="11.3 mm", Supplier=Digikey
TP7: library part CMP-954153-14, "KEYSTONE   5000   TEST POINT, PCB, THROUGH HOLE", Color=Red, Manufacturer=Keystone, Manufacturer Part Number=5000, Contact Material="Phosphor Bronze", Lead-Free Status="Lead Free", Octopart URL=https://octopart.com/5000-keystone-10045, OctopartID=c16f0865c3341ea8, Packaging=Bag, REACH SVHC Compliance="No SVHC", RoHS=Compliant, Size-Diameter="2.54 mm", Size-Height="7.62 mm", Size-Inner Diameter="1.27 mm", Size-Length="7.62 mm"
U1 U2: library part CMP-0ec6c674b100d101-1, "Isolated Module DC DC Converter 1 Output 12V - - - 83mA 4.5V - 5.5V Input", Manufacturer Part Number=PDS1-S5-S12-M-TR, Supplier Part Number=102-2686-1-ND, Lead-Free Status="Lead Free", Octopart URL=http://octopart.com/pds1-s5-s12-m-tr-cui-28875424, OctopartID=0ec6c674b100d101, RoHS=Compliant, Supplier=Digikey
U3: library part CMP-5e1b9542f71181dc-2, "LDK220 Series 2.5 to 13.2 Vin 200 mA 3.6 Vout LDO Linear Regulator - SOT23-5L", Manufacturer Part Number=LDK220M36R, Output Current="200 mA", Supplier Part Number=497-14825-1-ND, Lead-Free Status="Lead Free", Lifecycle Status=Active, Number of Pins=5, Octopart URL=http://octopart.com/ldk220m36r-stmicroelectronics-39029868, OctopartID=5e1b9542f71181dc, Packaging="Cut Tape (CT)", REACH SVHC Compliance="No SVHC", RoHS=Compliant, Supplier=Digikey
U4 U7: library part CMP-30e3f9ef6642ef24-3, "IC BUFFER INVERT 5.5V SOT23-5", Case/Package=SOT-23, Manufacturer Part Number=SN74LVC1G240DBVR, Supplier Part Number=‎74LVC1G14W5-7CT-ND‎, Supplier Part Number (old)=296-11609-1-ND, Supply Voltage (DC)="5.00 V, 5.50 V (max)", Lead-Free Status="Lead Free", Lifecycle Status=Active, Mounting Style="Surface Mount", Number of Bits=1, Number of Gates=1, Number of Pins=5, Octopart URL=http://octopart.com/sn74lvc1g240dbvr-texas+instruments-422855, OctopartID=30e3f9ef6642ef24, Packaging="Cut Tape (CT)", Propagation Delay Max (tpd)="4.00 ns", RoHS=Compliant, Supplier=Digikey
U5 U8: "General Purpose Digital Isolator 3000Vrms 1 Channel 100Mbps 85kV/µs CMTI 8-SOIC (0.154\", 3.90mm Width)", Mfr_Name="Texas Instruments", Supplier Part Number=ISO7710D-ND, Copyright="Copyright (C) 2022 Ultra Librarian. All rights reserved.", Manufacturer_Part_Number=ISO7710D, RefDes=RefDes, Supplier=Digikey, Type=DEV
U6 U9: library part CMP-2253518-3, "Low-Side Gate Driver IC Inverting SOT-23-5", Case/Package=SOT-23, Supplier Part Number=296-47249-1-ND, Lead-Free Status="Lead Free", Lifecycle Status=Active, MFG="TI (Texas Instruments)", Number of Outputs=1, Number of Pins=5, REACH SVHC Compliance="No SVHC", RoHS=Compliant, Supplier=Digikey

## Nets (pads, with @x,y where several pads share a name; then routed paths per layer and width w, separated by ;. In a path a pad name is that pad's centre, name@x,y a point inside that pad or via, vN(x,y) a via of type N, cw(c..) or ccw(c..) an arc to the next point about the centre after c; other vN are vias at no path point)
+3.6: C10.2 C11.1 C16.1 U3.5 U4.5 U7.5
+5: C1.1 C5.1 C9.2 D1.2 L1.1 L3.1 U3.1 U3.3
GND: C1.2 C2.2 C5.2 C6.2 C9.1 C10.1 C11.2 C16.2 J5.2 J5.3 J6.2 J6.4 R4.2 R7.2 U1.1 U2.1 U3.2 U4.3 U5.3 U7.3 U8.3
HVDC+: C23.2 C24.2 C25.2 C26.2 C27.2 C28.2 C29.2 J1.1 J4.1 Q1.2 TP2.TP | length 378
  Top Layer w10: 6545,4730 J1.1@6555,4745
  Top Layer w100: C27.2 6430,4735
HVDC-: C23.1 C24.1 C25.1 C26.1 C27.1 C28.1 C29.1 J2.1 R13.2 R14.2 TP7.TP
L+12: C8.2 C17.2 C18.1 C19.2 C20.2 L4.3 R2.2 R9.1 U8.8 U9.5
L-CTRL: R9.2 U8.6 U9.3
LCOM: C8.1 C17.1 C18.2 C19.1 C20.1 D3.1 L4.4 Q2.3 R13.1 R14.1 TP6.1 U8.5 U9.2
NetC2_1: C2.1 L1.2 U1.2
NetC3_1: C3.1 L2.2 U1.5
NetC3_2: C3.2 L2.1 U1.4
NetC6_1: C6.1 L3.2 U2.2
NetC7_1: C7.1 L4.2 U2.5
NetC7_2: C7.2 L4.1 U2.4
NetD1_1: D1.1 J5.1
NetD2_2: D2.2 R1.1
NetD3_2: D3.2 R2.1
NetJ6_1: J6.1 R7.1 U7.2
NetJ6_3: J6.3 R4.1 U4.2
NetQ1_1: Q1.1 R11.2 TP1.TP
NetQ2_1: Q2.1 R12.2 TP4.TP
NetR5_1: R5.1 U4.4
NetR5_2: R5.2 U5.2
NetR8_1: R8.1 U7.4
NetR8_2: R8.2 U8.2
NetR11_1: R11.1 U6.4
NetR12_1: R12.1 U9.4
U+12: C4.2 C12.2 C13.1 C14.2 C15.2 L2.3 R6.1 U5.8 U6.5
U-CTRL: R6.2 U5.6 U6.3
UCOM: C4.1 C12.1 C13.2 C14.1 C15.1 D2.1 J3.1 L2.4 Q1.3 Q2.2 TP3.1 TP5.TP U5.5 U6.2
pads on no net: J5.MH1 J5.MH2 R1.2 U1.0 U2.0 U3.4 U4.1 U5.1 U5.4 U5.7 U6.1 U7.1 U8.1 U8.4 U8.7 U9.1
copper on no net: | length 31526.5
  Top Layer w10: 1345,4716.69 1345,4655 ; 1375,3411.3 1756.3,3411.3 1760,3415 1760,3487.95 1887.95,3487.95 1890,3490 ; 1375,3608.15 1758.15,3608.15 ; 1375,3805 1375,4070 1545.94,4070 ; 1510,4797.24 1510,4905 ; 1540,4075.94 1540,4220 1355,4220 1350,4225 1285,4290 1285,4801.62 1283.31,4803.31 1345,4803.31 1345,4905 1675,4905 1675,4798.31 1676.69,4800 1750,4800 1810,4740 1930,4740 ; 1540,4459.06 1920.94,4459.06 ; 1547.4,4702.76 1547.4,4657.4 1545,4655 1345,4655 ; 1547.4,4797.24 1602.76,4797.24 1625,4775 1625,4715 1671.69,4715 ; 1670.94,4335.94 1675,4340 ; 1675,4711.69 1675,4570 1650,4545 1460,4545 1465,4540 1465,4340 1465.94,4340.94 1540,4340.94 1679.06,4340.94 ; 1760,3610 1881.3,3610 ; 1770,4340 1921.89,4340 ; 1890,3563.9 1890,3490 ; 1930,4331.89 2053.11,4331.89 2055,4330 2055,4355 2190,4355 ; 1930,4450 1930,4570 1930,4735 ; 1930,4738.31 2046.69,4738.31 2070,4715 2070,4455 2190,4455 ; 2000,3570.2 2000.2,3570 2075,3570 2095,3550 2095,3480 2110,3465 2170,3465 ; 2000,3645 2000,4050 1980,4070 1664.05,4070 1664.05,4220.95 1605,4280 1380,4280 1345,4315 1345,4655 ; 2190,4155 2190,3865 2205,3850 2326.88,3850 ; 2292.05,3465 2297.05,3470 2340,3470 2360,3490 2407,3490 ; 2330,3846.88 2326.88,3850 ; 2407,3390 2402,3385 2050,3385 2050,3440 2000,3490 1890,3490 ; 2443.12,3850 2605,3850 2620,3865 2620,4155 2735,4155 2745,4165 2745,4310 2860,4310 ; 2643.27,3390 2695,3390 2725,3360 3365,3360 3365,3290 3387.4,3267.6 3562.76,3267.6 ; 2643.27,3490 2695,3490 2702.95,3482.05 2765,3482.05 2974.21,3482.05 2982.16,3490 3165,3490 ; 2860,4210 2860,3770 2850,3760 2328.75,3760 2326.88,3761.88 2326.88,3850 ; 2980,3605.95 3164.7,3605.95 3263.75,3705 3555.94,3705 ; 3220,4210 3325,4210 3335,4200 3335,4170 3405,4170 ; 3220,4310 3405,4310 ; 3410,4315 3410,4565 ; 3498.98,4565 3410,4565 ; 3562.76,3305 3525,3305 3510,3320 3510,3590 3555.94,3635.94 3555.94,3705 ; 3621.02,4565 3720,4565 3755,4530 3755,4335 ; 3657.24,3342.4 3657.24,3688.19 ; 3674.06,3705 3680,3710.94 3680,3940 3900,3940 3905,3945 3905,4470 3695,4680 3410,4680 3410,4565 ; 3755,4165 3500,4165 3490,4175 3410,4175 3540,4045 3540,3720.94 3555.94,3705 ; 6150,4365 6155,4370 ; 6425,4370 6430,4375
  Top Layer w100: 3846.02,3190 4120,3190 ; 4110,3200 4121.77,3188.23 4121.77,2914.76 ; 4121.77,2735.24 4121.77,2581.77 4208.54,2495 4845,2495 ; 4305,3465 4952.68,3465 4955,3467.32 5392.68,3467.32 5400,3460 5400,4175 5410,4185 5920,4185 6150,4185 6155,4190 6425,4190 6430,4195 6430,3855 ; 4317.32,4550 5225,4550 5410,4365 5670,4365 5920,4365 5925,4370 6155,4370 6425,4370 ; 4336.02,1440 4545,1440 4551.77,1446.77 4795.24,1446.77 ; 4400,2825 5925,2825 ; 4845,2085 4845,2495 ; 4865,2515 4845,2495 ; 4880,1719.49 4880,2050 4885,2045 ; 4974.76,1446.77 4974.76,1145.24 4992.95,1127.05 5485,1127.05 ; 5245,1740 5245,1382.95 5485,1382.95 ; 5930,2820 6405,2820 ; 6420,2255 6180,2495 4845,2495 ; 6440,4745 6745,4745